# Altium PCB board.PcbDoc (part 2 of 2)
Units mil, origin at the board's own origin, x right, y up, seen from the top; angles counter-clockwise.
Board outline 2780 x 1500 mil, 6 copper layers (Top Layer, Mid Layer 1, Mid Layer 2, Mid Layer 3, Mid Layer 4, Bottom Layer), stack 60.566 mil thick; 88 components, 67 nets, 504 pads, 102 vias.
Unrouted connection lines stored in the file: 21.
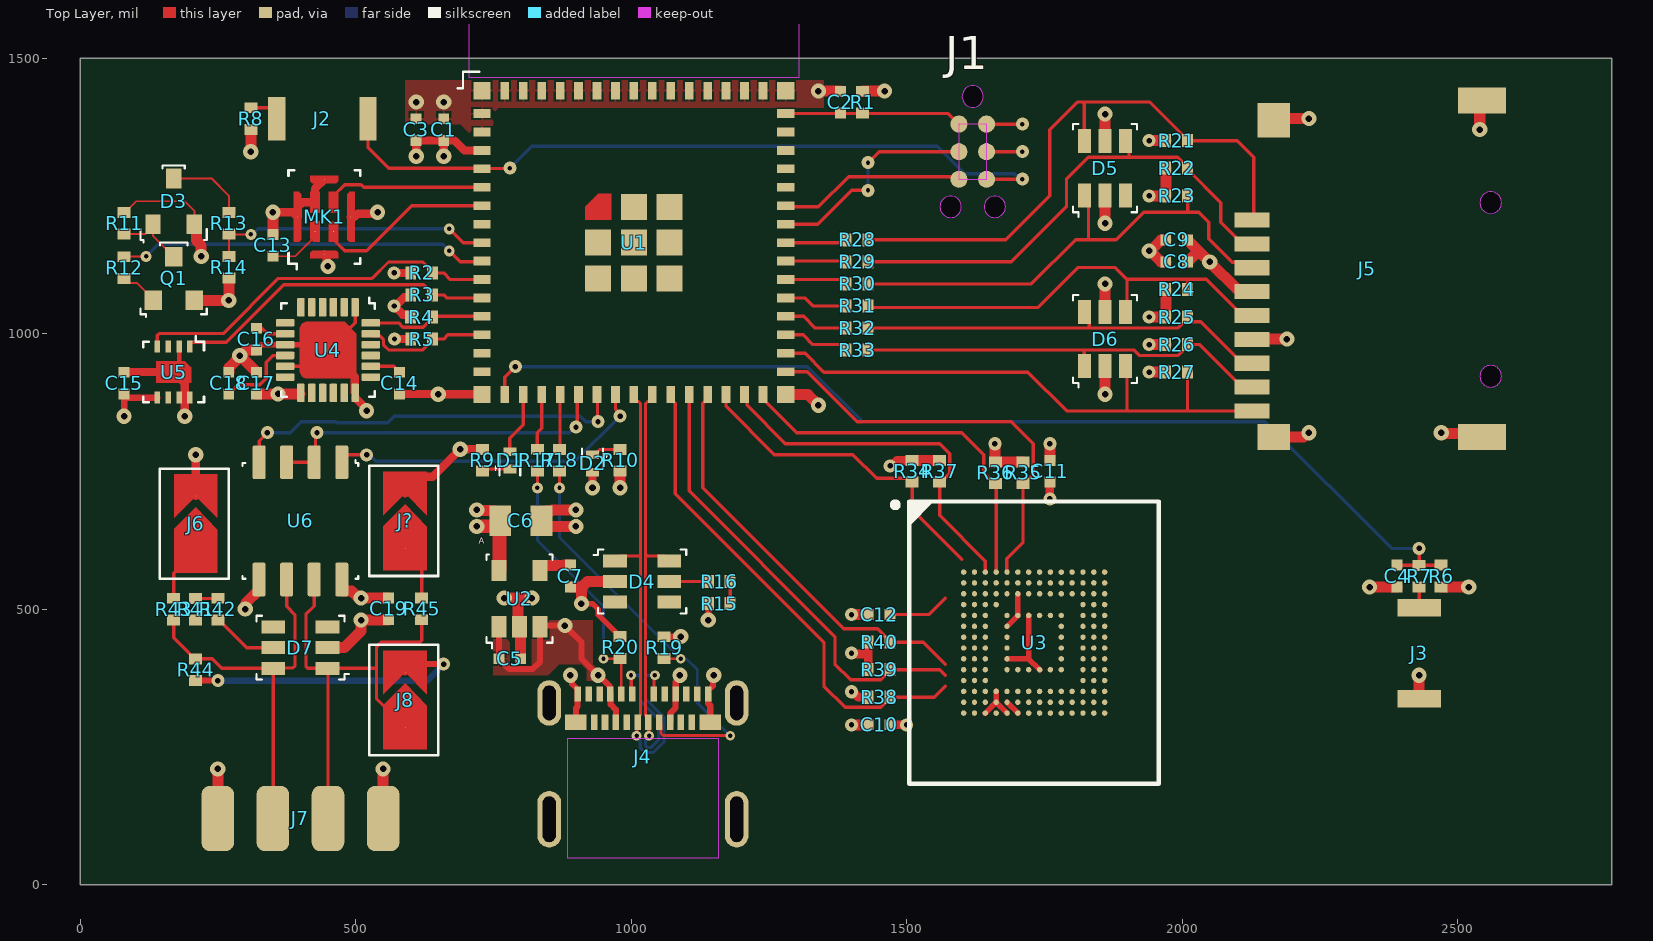
[diagram p0: Top Layer view]

## Part data (continued)
R17 R18: "RC Series 0402 0.063 W 0 Ohm Jumper Surface Mount Thick Film Chip Resistor RC0402FR-070RL", Case Code (Imperial)=0402, Case Code (Metric)=1005, JLCPCB=C106231, Manufacturer=Yageo, Manufacturer Part Number=RC0402FR-070RL, Max Operating Temperature=155°C, Max Power Dissipation=63mW, Min Operating Temperature=-55°C, Power Rating=62.5mW, Resistance=0R, Resistor Type="Thick Film", Temperature Coefficient=200ppm/°C, Tolerance=1%, Voltage Rating=50V, Case/Package=0402, Category="Chip SMD Resistors", ComponentLink1Description=https://datasheet.ciiva.com/8896/pyu-rc0402-51-rohs-l-6-8896149.pdf?src-supplier=Avnet, ComponentLink1URL=https://datasheet.ciiva.com/8896/pyu-rc0402-51-rohs-l-6-8896149.pdf?src-supplier=Avnet, ComponentLink2Description=https://datasheet.ciiva.com/16790/pyu-rc0402-51-rohs-l-6-r-16790444.pdf?src-supplier=Future+Electronics, ComponentLink2URL=https://datasheet.ciiva.com/16790/pyu-rc0402-51-rohs-l-6-r-16790444.pdf?src-supplier=Future+Electronics, Contact Plating=Tin,Matte, Features="Moisture Resistant", Height=0.35mm, Lead Free="Lead Free", Length=1mm, Mount="Surface Mount", Number of Terminations=2, Packaging="Tape and Reel", Pricing 1="10000=0,00120, 30000=0,00110, 50000=0,00100 (USD)", Pricing 2="1=0,10000, 10=0,01200, 25=0,00840, 50=0,00640, 100=0,00480, 250=0,00364, 500=0,00290, 1000=0,00214, 5000=0,00154 (USD)", Pricing 3="1=0,10000, 10=0,01400, 50=0,01400, 100=0,00600, 1000=0,00300, 5000=0,00200, 10000=0,00100 (USD)", Radiation Hardening=No, RoHS=Yes, RoHS Compliant=Yes, Series=RC, Size Code=0402, Stock 1=810000, Stock 2=9382775, Stock 3=8133261, Supplier 1="Arrow Electronics", Supplier 2=Digi-Key, Supplier 3=Mouser, Supplier Part Number 1=RC0402FR-070RL, Supplier Part Number 2=311-0.0LRCT-ND, Supplier Part Number 3=603-RC0402FR-070RL, Termination=SMD/SMT, Width=0.5mm
R19 R20: "Res Thick Film 1.0 x 0.5 mm 5.1K Ohm 1% 0.063W(1/16W) 100ppm/ C Molded SMD Paper T/R RC0402FR-075K1L", Case Code (Imperial)=0402, Case Code (Metric)=1005, JLCPCB=C105872, Manufacturer=Yageo, Manufacturer Part Number=RC0402FR-075K1L, Max Operating Temperature=155°C, Max Power Dissipation=63mW, Min Operating Temperature=-55°C, Package Quantity=1, Resistance=5.1kR, Resistance Tolerance=1%, Resistor Type="Thick Film", Temperature Coefficient=100ppm/°C, Voltage Rating=50V, Case/Package=0402, Category="Chip SMD Resistors", ComponentLink1Description=https://datasheet.ciiva.com/7983/1018594-7983519.pdf?src-supplier=Element14, ComponentLink1URL=https://datasheet.ciiva.com/7983/1018594-7983519.pdf?src-supplier=Element14, ComponentLink2Description=https://datasheet.ciiva.com/46394/1018594-46394936.pdf?src-supplier=Element14, ComponentLink2URL=https://datasheet.ciiva.com/46394/1018594-46394936.pdf?src-supplier=Element14, ComponentLink3Description=https://datasheet.ciiva.com/2453/pyu-r-int-thick-7-2453401.pdf?src-supplier=Digi-Key, ComponentLink3URL=https://datasheet.ciiva.com/2453/pyu-r-int-thick-7-2453401.pdf?src-supplier=Digi-Key, ComponentLink4Description=https://datasheet.ciiva.com/2453/pyu-r-int-thick-7-2453402.pdf?src-supplier=Digi-Key, ComponentLink4URL=https://datasheet.ciiva.com/2453/pyu-r-int-thick-7-2453402.pdf?src-supplier=Digi-Key, ComponentLink5Description=https://datasheet.ciiva.com/2453/pyu-r-int-thick-7-2453400.pdf?src-supplier=Digi-Key, ComponentLink5URL=https://datasheet.ciiva.com/2453/pyu-r-int-thick-7-2453400.pdf?src-supplier=Digi-Key, ComponentLink6Description=https://datasheet.ciiva.com/12558/pyu-rc0402-51-rohs-l-6-r-8721-12558460.pdf?src-supplier=Mouser, ComponentLink6URL=https://datasheet.ciiva.com/12558/pyu-rc0402-51-rohs-l-6-r-8721-12558460.pdf?src-supplier=Mouser, ComponentLink7Description=https://datasheet.ciiva.com/16744/pyu-rc0402-51-rohs-l-6-r-16744283.pdf?src-supplier=Future+Electronics, ComponentLink7URL=https://datasheet.ciiva.com/16744/pyu-rc0402-51-rohs-l-6-r-16744283.pdf?src-supplier=Future+Electronics, ComponentLink8Description=https://datasheet.ciiva.com/15189/getdatasheetpartid-323636-15189493.pdf?src-supplier=Verical, ComponentLink8URL=https://datasheet.ciiva.com/15189/getdatasheetpartid-323636-15189493.pdf?src-supplier=Verical, Construction=Rectangular, Depth=0.5mm, Features="Moisture Resistant", Height=0.016inch, Lead Free="Lead Free", Length=1mm, Military Standard=Not, Number of Terminations=2, Packaging="Tape and Reel", Power Rating=63mW, Pricing 1="10000=0,00180, 30000=0,00160, 50000=0,00140, 100000=0,00140 (USD)", Pricing 2="10000=0,00100 (GBP)", Pricing 3="1=0,10000, 10=0,01200, 50=0,01200, 100=0,00500, 1000=0,00300, 2500=0,00200, 10000=0,00100 (USD)", REACH SVHC=Unknown, RoHS=Yes, RoHS Compliant=Yes, Series=RC, Stock 1=170000, Stock 2=17100, Stock 3=769920, Supplier 1="Arrow Electronics", Supplier 2=RSComponents, Supplier 3=Mouser, Supplier Part Number 1=RC0402FR-075K1L, Supplier Part Number 2=1987834, Supplier Part Number 3=603-RC0402FR-075K1L, Technology="THICK FILM", Termination=SMD/SMT, Tolerance=1%, Voltage Rating (DC)=50V, Width=0.02inch, Working Voltage=50V
R28 R29 R30 R31 R32 R33: "Res Thick Film 0402 15 Ohm 5% 1/10W ±200ppm/°C Molded SMD Punched Carrier T/R ERJ-2GEJ150X", Case Code (Imperial)=0402, Case Code (Metric)=1005, JLCPCB=C412910, Manufacturer=Panasonic, Manufacturer Part Number=ERJ-2GEJ150X, Max Operating Temperature=155°C, Max Power Dissipation=100mW, Min Operating Temperature=-55°C, Package Quantity=1, Resistance=15R, Resistance Tolerance=5%, Resistor Type="Thick Film", Temperature Coefficient=200ppm/°C, Voltage Rating=50V, Case/Package=0402, Category="Chip SMD Resistors", ComponentLink1Description=https://datasheet.ciiva.com/11821/0900766b80f806dd-11821198.pdf?src-supplier=RSComponents, ComponentLink1URL=https://datasheet.ciiva.com/11821/0900766b80f806dd-11821198.pdf?src-supplier=RSComponents, ComponentLink2Description=https://datasheet.ciiva.com/8081/aoa0000ce1-8081306.pdf?src-supplier=Element14, ComponentLink2URL=https://datasheet.ciiva.com/8081/aoa0000ce1-8081306.pdf?src-supplier=Element14, ComponentLink3Description=https://datasheet.ciiva.com/43470/1678796-43470027.pdf?src-supplier=Farnell, ComponentLink3URL=https://datasheet.ciiva.com/43470/1678796-43470027.pdf?src-supplier=Farnell, ComponentLink4Description=https://datasheet.ciiva.com/46380/1678796-46380221.pdf?src-supplier=Element14, ComponentLink4URL=https://datasheet.ciiva.com/46380/1678796-46380221.pdf?src-supplier=Element14, ComponentLink5Description=https://datasheet.ciiva.com/16774/70260739-16774952.pdf?src-supplier=Allied+Electronics, ComponentLink5URL=https://datasheet.ciiva.com/16774/70260739-16774952.pdf?src-supplier=Allied+Electronics, ComponentLink6Description=https://datasheet.ciiva.com/9119/aoa0000ce1-9119005.pdf?src-supplier=Avnet, ComponentLink6URL=https://datasheet.ciiva.com/9119/aoa0000ce1-9119005.pdf?src-supplier=Avnet, Construction=Rectangular, Contact Plating=Tin, Depth=0.5mm, Features="Automotive AEC-Q200", Height=0.35mm, Lead Free="Lead Free", Length=1mm, Military Standard=Not, Mount="Surface Mount", Number of Terminations=2, Packaging="Tape and Reel", Power Rating=100mW, Pricing 1="1=0,04910, 10=0,01270, 25=0,00660, 100=0,00350, 250=0,00340, 3000=0,00330 (USD)", Pricing 2="1=0,10000, 10=0,02900, 50=0,02900, 100=0,01200, 1000=0,00600, 2500=0,00500, 5000=0,00400, 10000=0,00400 (USD)", Radiation Hardening=No, REACH SVHC="No SVHC", RoHS=Yes, RoHS Compliant=Yes, Series=ERJ, Stock 1=8902, Stock 2=72720, Supplier 1="Arrow Electronics", Supplier 2=Mouser, Supplier 3=RSComponents, Supplier Part Number 1=ERJ-2GEJ150X, Supplier Part Number 2=667-ERJ-2GEJ150X, Supplier Part Number 3=7324921, Technology="THICK FILM", Termination=SMD/SMT, Tolerance=5%, Voltage Rating (DC)=50V, Width=0.5mm
R44: "Res General Purpose Thick Film 0402 100 Ohm 5% 1/16W ±100ppm/°C Molded SMD Paper T/R RC0402JR-07100RL", Case Code (Imperial)=0402, Case Code (Metric)=1005, JLCPCB=C106233, Manufacturer=Yageo, Manufacturer Part Number=RC0402JR-07100RL, Max Operating Temperature=155°C, Max Power Dissipation=63mW, Min Operating Temperature=-55°C, Package Quantity=1, Resistance=100R, Resistance Tolerance=5%, Resistor Type="Thick Film", Temperature Coefficient=100ppm/°C, Voltage Rating=50V, Case/Package=0402, Category="Chip SMD Resistors", ComponentLink1Description=https://datasheet.ciiva.com/46394/1018594-46394943.pdf?src-supplier=Element14, ComponentLink1URL=https://datasheet.ciiva.com/46394/1018594-46394943.pdf?src-supplier=Element14, ComponentLink2Description=https://datasheet.ciiva.com/2452/pyu-r-int-thick-7-2452618.pdf?src-supplier=Digi-Key, ComponentLink2URL=https://datasheet.ciiva.com/2452/pyu-r-int-thick-7-2452618.pdf?src-supplier=Digi-Key, ComponentLink3Description=https://datasheet.ciiva.com/2452/pyu-r-int-thick-7-2452619.pdf?src-supplier=Digi-Key, ComponentLink3URL=https://datasheet.ciiva.com/2452/pyu-r-int-thick-7-2452619.pdf?src-supplier=Digi-Key, ComponentLink4Description=https://datasheet.ciiva.com/2452/pyu-r-int-thick-7-2452617.pdf?src-supplier=Digi-Key, ComponentLink4URL=https://datasheet.ciiva.com/2452/pyu-r-int-thick-7-2452617.pdf?src-supplier=Digi-Key, ComponentLink5Description=https://datasheet.ciiva.com/12577/pyu-rc0402-51-rohs-l-6-r-12577725.pdf?src-supplier=Mouser, ComponentLink5URL=https://datasheet.ciiva.com/12577/pyu-rc0402-51-rohs-l-6-r-12577725.pdf?src-supplier=Mouser, ComponentLink6Description=https://datasheet.ciiva.com/7850/1018594-7850135.pdf?src-supplier=Element14, ComponentLink6URL=https://datasheet.ciiva.com/7850/1018594-7850135.pdf?src-supplier=Element14, ComponentLink7Description=https://datasheet.ciiva.com/7850/1018594-7850134.pdf?src-supplier=Element14, ComponentLink7URL=https://datasheet.ciiva.com/7850/1018594-7850134.pdf?src-supplier=Element14, ComponentLink8Description=https://datasheet.ciiva.com/16740/pyu-rc0402-51-rohs-l-6-r-16740924.pdf?src-supplier=Future+Electronics, ComponentLink8URL=https://datasheet.ciiva.com/16740/pyu-rc0402-51-rohs-l-6-r-16740924.pdf?src-supplier=Future+Electronics, Construction=Rectangular, Depth=0.5mm, Features="Moisture Resistant", Height=0.016inch, Lead Free="Lead Free", Length=1mm, Military Standard=Not, Number of Terminations=2, Packaging="Tape and Reel", Power Rating=63mW, Pricing 1="10000=0,00120, 30000=0,00110, 100000=0,00100 (USD)", Pricing 2="1000=0,00400, 2500=0,00400, 5000=0,00400, 10000=0,00300 (GBP)", Pricing 3="1=0,10000, 10=0,01200, 100=0,00500, 1000=0,00225, 2500=0,00195, 5000=0,00161 (USD)", Pricing 4="1=0,10000, 10=0,01000, 50=0,01000, 100=0,00500, 1000=0,00200, 10000=0,00100 (USD)", REACH SVHC="No SVHC", RoHS=Yes, RoHS Compliant=Yes, Series=RC, Size Code=0402, Stock 1=7500000, Stock 2=25100, Stock 3=12189062, Stock 4=1266422, Supplier 1="Arrow Electronics", Supplier 2=RSComponents, Supplier 3=Digi-Key, Supplier 4=Mouser, Supplier Part Number 1=RC0402JR-07100RL, Supplier Part Number 2=1987887P, Supplier Part Number 3=311-100JRCT-ND, Supplier Part Number 4=603-RC0402JR-07100RL, Termination=SMD/SMT, Tolerance=5%, Weight=2.3E-05oz, Width=0.02inch
U1: "SMD Module, ESP32-S3FN8, 8 mb Sp ESP32-S3-MINI-1-N8", JLCPCB=C2913206, Manufacturer="Espressif Systems", Manufacturer Part Number=ESP32-S3-MINI-1-N8, Supplier Part Number 1=1965-ESP32-S3-MINI-1-N8-ND, Category=Uncategorized, ComponentLink1Description="Real datasheet", ComponentLink1URL=https://www.espressif.com/sites/default/files/documentation/esp32-s3-mini-1_mini-1u_datasheet_en.pdf, Pricing 1="1=3,41000 (USD)", RoHS=No, Stock 1=6782, Supplier 1=Digi-Key
U2: library part "U SPX3819M5 3.3V", "SPX3819 Series 3.3 V 500 mA Fixed Output SMT LDO Regulator - SOT-23-5", JLCPCB=C9055, Manufacturer=MaxLinear, Supplier Part Number 1=701-SPX3819M5-L-33TR, Category="Voltage Regulators - Linear", Manufacturer Part Number=SPX3819M5-L-3-3/TR, Pricing 1="1=0,56000, 10=0,45600, 50=0,45600, 100=0,32800, 1000=0,21500, 10000=0,19500 (USD)", Pricing 2="10=0,59100, 50=0,46800, 100=0,45400, 250=0,39800, 500=0,33700, 10=0,42700, 50=0,33800, 100=0,32800, 250=0,28700, 500=0,24300 (USD)", RoHS=Yes, RoHS Compliant=Yes, Stock 1=726, Stock 2=290, Supplier 1=Mouser, Supplier 2=RSComponents, Supplier Part Number 2=8472888
U3: "KLMAG1JETD-B041 16Gbit -25℃~+85℃ 2.7V~3.6V eMMC 5.1 FBGA-153 eMMC ROHS", JLCPCB=C499919, Manufacturer=Samsung, Manufacturer Part Number=KLMAG1JETD-B041, Supplier Part Number 1=KLMAG1JETD-B0410, RoHS=No, Supplier 1="Arrow Electronics"
U4: "IMU ACCEL/GYRO 3-AXIS I2C 24QFN", Case/Package=QFN, JLCPCB=C24112, Manufacturer="TDK InvenSense", Manufacturer Part Number=MPU-6050, Max Operating Temperature=85°C, Min Operating Temperature=-40°C, Category="Inertial Measurement Units (IMUs)", ComponentLink1Description=https://datasheet.ciiva.com/1513/1788002-1513632.pdf?src-supplier=Element14, ComponentLink1URL=https://datasheet.ciiva.com/1513/1788002-1513632.pdf?src-supplier=Element14, ComponentLink2Description=https://datasheet.ciiva.com/22731/1788002-22731434.pdf?src-supplier=Element14, ComponentLink2URL=https://datasheet.ciiva.com/22731/1788002-22731434.pdf?src-supplier=Element14, Mount="Surface Mount", Output Type=I2C, Packaging="Tape and Reel", Pricing 1="5000=3,94760, 10000=3,89200, 20000=3,78080, 30000=3,69740, 40000=3,55840, 50000=3,47500, 500000=3,39160 (USD)", RoHS=Yes, RoHS Compliant=Yes, Sensor Type="Accelerometer,Gyroscope,3 Axis", Series=-, Supplier 1=Avnet, Supplier Part Number 1=MPU-6050
U5: "Humidity/Temperature Sensor Digital Serial (I2C) 8-Pin DFN EP T/R SHT30-DIS-B2.5KS", JLCPCB=C77361, Manufacturer=Sensirion, Manufacturer Part Number=SHT30-DIS-B2.5KS, Category="Temperature and Humidity Sensors", ComponentLink1Description=https://media.digikey.com/pdf/Data%20Sheets/Sensirion%20PDFs/HT_DS_SHT3x_DIS.pdf?src-supplier=Digi-Key, ComponentLink1URL=https://media.digikey.com/pdf/Data%20Sheets/Sensirion%20PDFs/HT_DS_SHT3x_DIS.pdf?src-supplier=Digi-Key, Pricing 1="2500=1,79820 (USD)", Pricing 2="1=3,98000, 5=3,51000, 10=3,10000, 25=2,51560, 50=2,22300, 100=2,16450, 500=1,81350, 1000=1,69650 (USD)", Pricing 3="1=3,86000, 10=2,45000, 50=2,45000, 100=2,25000, 500=1,90000, 1000=1,78000, 2500=1,71000, 5000=1,57000, 10000=1,55000, 25000=1,52000 (USD)", RoHS=Yes, RoHS Compliant=Yes, Stock 1=90000, Stock 2=10530, Stock 3=49374, Supplier 1="Arrow Electronics", Supplier 2=Digi-Key, Supplier 3=Mouser, Supplier Part Number 1=SHT30-DIS-B2.5KS, Supplier Part Number 2=1649-1009-1-ND, Supplier Part Number 3=403-SHT30-DIS-B
U6: "Single Transmitter/Receiver RS-422/RS-485 8-Pin SOIC N", Case/Package=SOIC, JLCPCB=C9943, Manufacturer=Maxim, Manufacturer Part Number=MAX3485EESA+, Max Operating Temperature=85°C, Max Power Dissipation=471mW, Max Supply Voltage=3.6V, Min Operating Temperature=-40°C, Min Supply Voltage=3V, Operating Supply Current=1.1mA, Operating Supply Voltage=3.3V, Output Current=20uA, Package Quantity=100, Supplier Part Number 1=1901234P, Category="RS-232 / RS-422 / RS-485 Interface ICs", ComponentLink1Description=https://datasheet.ciiva.com/1714/max3483e-max3491e-1714390.pdf?src-supplier=Digi-Key, ComponentLink1URL=https://datasheet.ciiva.com/1714/max3483e-max3491e-1714390.pdf?src-supplier=Digi-Key, ComponentLink2Description=https://datasheet.ciiva.com/3028/max3483e-max3491e-3028632.pdf?src-supplier=Avnet, ComponentLink2URL=https://datasheet.ciiva.com/3028/max3483e-max3491e-3028632.pdf?src-supplier=Avnet, Contact Plating=Tin,Matte, Data Rate=15Mbps, Height=1.5mm, Interface=RS-422,RS-485, Length=5mm, Logic Function=Transceiver, Mount="Surface Mount", Number of Drivers=1, Number of Pins=8, Number of Receivers=1, Number of Transceivers=1, Number of Transmitters=1, Output Voltage=3V, Packaging=Rail/Tube, Pricing 1="25=6,27000, 50=5,80800, 125=5,54400 (GBP)", Pricing 2="1=7,18000, 10=6,49000, 50=6,19000, 100=5,37000, 1000=5,12000, 10000=5,12000 (USD)", Propagation Delay=62ns, Radiation Hardening=No, REACH SVHC="No SVHC", RoHS=Yes, RoHS Compliant=Yes, Series=-, Simplex/Duplex="Half Duplex", Stock 1=4140, Supplier 1=RSComponents, Supplier 2=Mouser, Supplier Part Number 2=700-MAX3485EESA, Weight=0.019048oz, Width=4mm

## Via types
v1: diameter 27.56, hole 11.81, Top Layer to Bottom Layer, 56 vias
v2: diameter 23.62, hole 9.84, Top Layer to Bottom Layer, 27 vias
v3: diameter 17.72, hole 7.87, Top Layer to Bottom Layer, 7 vias
v4: diameter 23.62, hole 7.87, Top Layer to Bottom Layer, 6 vias
v5: diameter 19.68, hole 7.87, Top Layer to Bottom Layer, 6 vias

## Nets (pads, with @x,y where several pads share a name; then routed paths per layer and width w, separated by ;. In a path a pad name is that pad's centre, name@x,y a point inside that pad or via, vN(x,y) a via of type N, cw(c..) or ccw(c..) an arc to the next point about the centre after c; other vN are vias at no path point)
+3.3: C1.1 C3.1 C6.A C8.2 C9.2 C10.2 C11.2 C15.2 C16.1 C17.2 D2.2 D5.5 D6.5 J1.2 J5.4 J6.2 J7.4 R1.2 R2.2 R3.2 R4.2 R5.2 R6.2 R21.2 R22.2 R23.2 R24.2 R25.2 R26.2 R27.2 R34.2 R35.2 R36.2 R37.2 R38.1 R39.2 R40.1 R41.2 U1.3 U2.5 U3.C6 U3.E6 U3.F5 U3.J10 U3.K9 U3.M4 U3.N4 U3.P3 U3.P5 U4.8 U4.13 U5.5 | length 2129.5
  Top Layer w6: C16.1 320.32,1010 330,1010 340.47,999.53 U4.8 ; J1.2 v4(1710,1380)
  Top Layer w10: U3.P3 U3.N4 ; U3.M4 U3.N4 ; U3.P5 U3.N4 ; U3.F5 U3.E6 U3.C6
  Top Layer w11.81: v1(80,850) C15.2@80,883.74 ; C15.2 C15.2@80,883.74 ; U5.5 C15.2@80,883.74
  Top Layer w15: J6.2 v1(210,780) ; v2(570,1050) 585.69,1034.31 597.66,1034.31 600,1031.97 R4.2 ; v2(570,1110) R2.2 ; v2@570.68,990.03 R5.2 ; v2@572.33,1050 588.02,1065.69 597.97,1065.69 600.32,1068.03 R3.2 ; v1(610,1321.78) C3.1 C1.1 ; v1(660,1321.78) C1.1 ; U1.3 697.72,1332.28 679.69,1350.31 C1.1 ; v1(930,720) D2.2
  Top Layer w15.75: v2(1400,350) 1402.13,350 1412.13,340 R38.1 ; v2(1400,420) 1401.51,418.49 1426.82,418.49 1430.31,415 ; R39.2 1430.31,415 ; R40.1 1430.31,415 ; C10.2 v2(1500,290) ; v2(1470,760) 1472.13,760 1481.82,769.69 R34.2 ; v2(1760,700) C11.2
  Top Layer w20: J7.4 v1(250,210) ; C17.2 U4.13@398.86,890.31 ; v1(720,680) 721.45,678.55 744.04,678.55 745.04,677.56 752.91,677.56 762.6,667.87 C6.A ; R1.2 1420.16,1439.84 1422.13,1439.84 1422.28,1440 v1(1460,1440) ; R34.2 R37.2 ; v2(1660,800) 1660.63,799.37 1660.63,767.32 1660.79,767.17 R36.2 R35.2 ; D6.5 v1(1860,1090) ; D5.5 v1(1860,1398.22) ; v2(1940,930) R27.2 ; v2(1940,980) R26.2 ; v2(1940,1030) R25.2 R24.2 ; v2(1940,1250) R23.2 R22.2 ; v2(1940,1350) R21.2 ; C8.2 2029.61,1149.92 ; C9.2 2029.61,1150.08 2029.61,1149.92 ; v1@2049.76,1129.76 2029.61,1149.92 ; v1(2050,1130) 2100.16,1079.84 2123.15,1079.84 J5.4 ; R6.2 2470.16,540.16 2476.06,540.16 2476.22,540 v1(2520,540)
  Top Layer w25: v1(720,650) 720.49,650.49 755.41,650.49 C6.A@761.08,656.16 ; U2.5 761.08,571.08 C6.A@761.08,656.16 ; C6.A 762.6,657.67 C6.A@761.08,656.16
  other v1: 359.43,890.31
  other v2: 570.65,990.05
ACTIVATE_ADC: R12.1 U1.9 | length 672.5
  Top Layer w3.5: R12.1 80.63,1140 v5(120,1140)
  Top Layer w6: v5(670,1150) 690,1130 727.95,1130 U1.9
  Bottom Layer w6: v5(120,1140) 141.78,1161.78 658.22,1161.78 v5(670,1150)
ADC_MEASURE: R13.1 R14.2 U1.8 | length 514.4
  Top Layer w3.5: R14.2 R13.1 270.32,1180 v5(310,1180)
  Top Layer w6: v5(670,1190) 695.04,1164.96 U1.8
  Bottom Layer w6: v5(310,1180) 313.7,1180 323.7,1190 v5(670,1190)
CC1: R17.2 U1.18 | length 102.6
  Top Layer w6: R17.2 830,820 837.72,827.72 U1.18
CC2: R18.2 U1.19 | length 100.2
  Top Layer w6: R18.2 871.18,790.87 U1.19
EMMC_CLK: R38.2 U1.25 U3.M5 | length 897.4
  Top Layer w6: U1.25 1071.97,881.5 1080,873.46 1080,709.47 1350,439.47 1350,360 1388.31,321.69 1453.34,321.69 1469.69,338.03 R38.2 1550,340 1570,360
EMMC_CMD: R39.1 U1.26 U3.M6 | length 823.6
  Top Layer w6: U1.26 1105.43,714.57 1370,450 1370,400 1398.31,371.69 1453.34,371.69 1469.69,388.03 R39.1 1560,390 1570,380
EMMC_DAT0: R37.1 U1.29 U3.A3 | length 683.9
  Top Layer w6: U1.29 1210.4,884.79 1210.4,869.6 1280,800 1560.53,800 1578.31,782.22 1578.31,746.66 1561.97,730.31 R37.1 1560,670 1642.83,587.17 U3.A3
EMMC_DAT1: R36.1 U1.30 U3.A4 | length 673.9
  Top Layer w6: U1.30 1239.29,881.5 1300.79,820 1600,820 1640,780 1640,747.09 1659.29,727.8 R36.1 1662.52,726.54 U3.A4
EMMC_DAT2: R35.1 U1.31 U3.A5 | length 757.9
  Top Layer w6: U1.31 1319.29,930.71 1410,840 1690,840 1730,800 1730,744.57 1713.23,727.8 R35.1 1711.26,621.26 1681.47,591.47 1681.47,567.9 U3.A5
EMMC_DAT3: R34.1 U1.28 U3.B2 | length 593.8
  Top Layer w6: U1.28 1172.36,867.64 1260,780 1402.68,780 1445.52,737.16 1503.16,737.16 R34.1 1510,680 1600,590
EMMC_RSTN: R40.2 U1.27 U3.K5 | length 747.1
  Top Layer w6: U1.27 1138.9,881.5 1134.02,876.62 1133.51,876.62 1130,873.11 1130,720 1385.59,464.41 1447.25,464.41 1469.69,441.97 R40.2 1530,440 1570,400
ESP_RXD: J1.5 U1.40 | length 339.8
  Top Layer w6: U1.40 1282.52,1230 1340,1230 1394.78,1284.78 1590.22,1284.78 J1.5
ESP_TXD: J1.3 U1.39 | length 398.2
  Top Layer w6: U1.39 1338.43,1198.43 1400,1260 v4(1430,1260) ; v4(1430,1310) 1450,1330 J1.3
  Bottom Layer w6: v4(1430,1260) v4(1430,1310)
GND: C1.2 C2.1 C3.2 C4.1 C5.1 C6.K C7.1 C8.1 C9.1 C10.1 C11.1 C12.1 C13.1 C14.2 C15.1 C16.2 C17.1 C18.1 C19.2 D4.2 D5.2 D6.2 D7.2 J1.4 J3.1 J4.A1 J4.A12 J4.B1 J4.B12 J5.6 J5.CASE J7.1 J?.2 MK1.2 MK1.5 MK1.6 MK1.7 MK1.8 Q1.2 R8.1 R9.1 R10.1 R14.1 R19.1 R20.1 U1.1 U1.2 U1.42 U1.43 U1.46 U1.62 U2.2 U3.A6 U3.C4 U3.E7 U3.G5 U3.H10 U3.J5 U3.K8 U3.N2 U3.N5 U3.P4 U3.P6 U4.1 U4.9 U4.11 U4.18 U4.25 U5.2 U5.7 U5.8 U5.DP U6.5 | length 3631.8
  Top Layer w6: U4.11 420.47,940.47 U4.25 ; 440.16,979.84 U4.25 ; U4.1 499.21,1019.21 U4.25 ; J1.4 v4(1710,1330) ; J5.CASE@2540,1418.27 J5.CASE@2544.25,1422.52
  Top Layer w7.87: U5.DP 180,940 180,976.1 U5.2
  Top Layer w9.84: C16.2 329.53,979.84 U4.9 440.16,979.84
  Top Layer w10: v1(910,510) 930,510 940.63,499.37 940.63,489.37 973.19,456.81 973.19,454.84 978.03,450 R20.1 ; U3.N5 U3.P6 ; U3.J5 1721.57,409.69 ; U3.E7 1721.57,409.69 ; U3.K8 1721.57,409.69
  Top Layer w11: v1(890,380) 893.17,376.83 893.17,364 903.06,354.11 903.06,323.06 900,320 900,295.12 J4.B12 ; R19.1 1060.16,449.84 1089.84,449.84 v1(1090,450) ; J4.B1 1143.62,324.93 1140.09,328.46 1140.09,345.42 J4.A12 1139.69,353.7 1140.09,354.11 1142.18,354.11 1148.63,360.55 1148.63,378.63 v1(1150,380)
  Top Layer w15: C15.1 80.32,930 U5.DP 190,910 v1(190,850) ; v1(350,1220) 386.61,1220 MK1.6 395.04,1229.36 403.83,1238.15 MK1.2 426.54,1262.76 MK1.7 ; MK1.5 447.6,1139.33 447.6,1124.18 v1(450,1121.78) ; U4.25 498.6,921.4 498.6,892.85 U4.18 ; MK1.8 498.18,1211.57 504.2,1217.6 537.6,1217.6 v1(540,1220) ; U4.18@499.82,883.01 520,862.83 v1(520,860) ; C14.2 580.16,890.16 649.84,890.16 v1(650,890) 650.32,889.69 729.13,889.69 U1.62@729.45,889.37 ; J?.2 620,740 640,740 v1(690,790) 690.16,789.84 729.84,789.84 R9.1
  Top Layer w20: Q1.2 207.72,1060.31 269.69,1060.31 v1(270,1060) R14.1 ; C18.1 270,937.95 290,957.95 v1(290,960) ; v1(300,500) 301.45,501.45 301.45,511.45 325,535 U6.5 ; v1(310,1330) R8.1 ; C17.1 320,930 v1(290,960) ; C16.2 310.32,970.31 310,970 302.05,970 292.05,960 v1(290,960) ; C13.1 v1(350,1220) ; D7.2 480,430 510,460 v1(510,480) 559.37,480 C19.2 ; J7.1 v1(550,210) ; v1(770,520) 795,520 ; C5.1 799.68,465.75 U2.2 795,470.43 795,520 ; v1(820,520) 795,520 ; C7.1 909.75,540.32 910,540.06 910,539.06 ; v1(900,650) 847.09,650 837.4,659.69 C6.K 837.4,667.87 847.09,677.56 854.96,677.56 857.4,680 v1(900,680) ; v1(910,510) 910,539.06 ; D4.2 920.94,550 910,539.06 ; v1(980,720) R10.1 ; U1.62@1280.63,889.37 1320.63,889.37 v1(1340,870) ; v1(1340,1440) 1379.69,1440 C2.1 ; v2(1400,290) C10.1 ; v2(1400,490) C12.1 ; C11.1 v2(1760,800) ; v1(1860,890) D6.2 ; v1(1860,1200) D5.2 ; v1(1940,1150) v1@1942.05,1150 ; C8.1 1962.05,1130 v1@1942.05,1150 ; C9.1 1962.05,1170 v1@1942.05,1150 ; J5.6 2127.2,989.72 2189.72,989.72 v1(2190,990) ; J5.CASE@2166.3,812.28 2220.24,812.28 2227.95,820 v1(2230,820) ; J5.CASE@2166.3,1387.09 2169.21,1390 v1(2230,1390) ; v1(2340,540) 2389.69,540 C4.1 ; J3.1 v1(2430,380) ; v1(2470,820) 2471.45,818.55 2537.98,818.55 J5.CASE@2544.25,812.28 ; v1(2540,1370) J5.CASE@2540,1418.27
  other v1: 610,1420 660,1420
I2SCLK: MK1.3 U1.5 | length 291.5
  Top Layer w6: MK1.3 460,1250 480,1270 510,1270 514.65,1265.35 U1.5
I2SDAT: MK1.4 U1.6 | length 326.7
  Top Layer w6: MK1.4 460,1170 480,1150 520,1150 601.89,1231.89 U1.6
NetC4_2: C4.2 R6.1 R7.2 U1.16 | length 1945.9
  Top Layer w6: U1.16 770.79,920.79 v2(790,940) ; C4.2 R7.2@2430,579.68 ; v2(2430,610) R7.2@2430,579.68 ; R6.1 R7.2@2430,579.68
  Top Layer w20: R7.2 R7.2@2430,579.68
  Bottom Layer w6: v2(790,940) 1320,940 1420,840 2150,840 2380,610 v2(2430,610)
NetC7_2: C7.2 U2.4 | length 62.7
  Top Layer w20: U2.4 834.8,575.91 838.39,579.49 878.39,579.49 878.58,579.68 C7.2
NetC12_2: C12.2 U3.C2 | length 112.7
  Top Layer w6: C12.2 1540,490 1570,520
NetC13_2: C13.2 MK1.1 | length 100
  Top Layer w3.5: C13.2 390.32,1140.31 426.54,1176.54 MK1.1
NetC14_1: C14.1 U4.20 | length 56.8
  Top Layer w6: U4.20 569.21,940.47 C14.1
NetC18_2: C18.2 U4.10 | length 148.3
  Top Layer w6: C18.2 286.84,907.15 326.35,907.15 338.17,918.98 338.17,948.17 350,960 372.09,960 U4.10
NetD1_1: D1.1 R9.2 | length 51.6
  Top Layer w6: R9.2 733.94,754.25 D1.1
NetD1_2: D1.2 U1.17 | length 113.7
  Top Layer w6: D1.2 780,810 804.25,834.25 U1.17
NetD2_1: D2.1 R10.2 | length 54
  Top Layer w6: D2.1 933.94,780 943.62,789.69 R10.2
NetD3_1: D3.1 Q1.3 R11.1 | length 134.5
  Top Layer w3.5: R11.1 118.19,1180.31 D3.1@132.6,1194.72 ; D3.1 D3.1@132.6,1194.72 ; Q1.3 170,1141.34 156,1155.34 154.03,1155.34 132.6,1176.77 D3.1@132.6,1194.72
NetD3_3: D3.3 R13.2 | length 143.3
  Top Layer w3.5: D3.3 238.66,1281.34 270,1250 R13.2
NetD4_5: D4.5 R16.1 | length 71.1
  Top Layer w6: D4.5 R16.1
NetD5_1: D5.1 J5.3 R23.1 R30.1 | length 920.9
  Top Layer w6: R30.1 1726.49,1090 1806.49,1170 1830,1170 ; D5.1 1830,1243.39 1830,1170 ; R23.1@2009.69,1248.03 2010,1247.72 2010,1221.43 ; J5.3 2117.08,1129.22 2090.78,1129.22 2047.98,1172.02 2047.98,1202.02 2030,1220 2010,1220 1930,1220 1880,1170 1830,1170
NetD5_4: D5.4 J5.2 R22.1 R29.1 | length 925.4
  Top Layer w6: R29.1 1690,1130 1790,1230 1790,1280 1830,1320 1903.51,1320 ; D5.4 1903.51,1343.1 1903.51,1320 ; J5.2 2109.21,1162.68 2070,1201.89 2070,1237.72 2009.69,1298.03 2009.69,1301.97 1991.65,1320 1903.51,1320
NetD5_6: D5.6 J5.1 R21.1 R28.1 | length 1101.9
  Top Layer w6: R28.1 1680,1170 1760,1250 1760,1370 1810,1420 1820,1420 ; D5.6 1822.6,1417.4 1820,1420 ; R21.1 2100,1350 2130,1320 2130,1209.06 J5.1 ; R21.1@2009.69,1351.97 1941.65,1420 1822.6,1420 1820,1420
NetD6_1: D6.1 J5.8 R26.1 R33.1 | length 772
  Top Layer w6: R33.1 1822.6,970 ; D6.1 1822.6,970 ; J5.8 2109.21,902.83 2032.05,980 R26.1 2009.69,978.03 1991.65,960 1923.05,960 1913.05,970 1822.6,970
NetD6_4: D6.4 J5.5 R24.1 R31.1 | length 843.1
  Top Layer w6: R31.1 1432.39,1047.3 1738.54,1047.3 1811.24,1120 1878.09,1120 1899.78,1098.31 ; D6.4 1899.78,1041.59 1899.78,1098.31 ; R24.1 2010,1080.31 2010,1098.31 ; J5.5 2109.21,1032.76 2043.66,1098.31 2010,1098.31 ; 1899.78,1098.31 2010,1098.31
NetD6_6: D6.6 J5.7 R25.1 R32.1 | length 773.5
  Top Layer w6: R32.1 1831.41,1010 ; D6.6 1831.41,1030.4 1831.41,1010 ; R25.1 R25.1@2009.69,1028.03 ; J5.7 2109.21,946.14 2034.17,1021.19 2016.53,1021.19 R25.1@2009.69,1028.03 ; 1831.41,1010 1991.65,1010 R25.1@2009.69,1028.03
NetD7_1: D7.1 J7.2 J8.1 R45.2 U6.7 | length 859.5
  Top Layer w6: U6.7 425,505.59 410,490.59 410,396.11 413.51,392.6 D7.1 ; J7.2 450,391.81 D7.1 ; J8.1 538.17,336.83 538.17,390 ; R45.2 620,443.51 616.49,440 546.33,440 538.17,431.83 538.17,390 ; D7.1 535.57,392.6 538.17,390
NetD7_5: D7.5 R42.1 | length 121.6
  Top Layer w6: R42.1 251.97,480.32 302.28,430 D7.5
NetD7_6: D7.6 J7.3 R43.1 R44.2 U6.6 | length 713.6
  Top Layer w6: R43.1 170,447.72 208.03,409.68 R44.2 210.32,410 240,410 257.4,392.6 D7.6 ; J7.3 350.79,120.79 D7.6 ; U6.6 375,505 390,490 390,396.64 386.49,393.12 351.31,393.12 D7.6
NetJ2_1: J2.1 R8.2 | length 59.5
  Top Layer w6: R8.2 344.57,1409.69 357.32,1396.94 J2.1
NetJ3_2: J3.2 R7.1 | length 37.3
  Top Layer w6: J3.2 R7.1
NetJ4_A5: J4.A5 R17.1 R20.2 | length 486.3
  Top Layer w5: v5(830,720) R17.1 ; v3(950,410) 979.37,410 R20.2 982.2,408.43 J4.A5
  Bottom Layer w5: v5(830,720) 830,624.73 950,504.73 v3(950,410)
NetJ4_B5: J4.B5 R18.1 R19.2 | length 793.8
  Top Layer w5: v5(870,720) R18.1 ; J4.B5 1054.51,291.24 1054.51,274.25 1058.08,270.68 1179.31,270.68 v3(1180,270) ; R19.2 1060.32,410 v3(1090,410)
  Bottom Layer w5: v5(870,720) 870,630 1091.57,408.43 1101.57,408.43 1120,390 1120,330 v3(1180,270)
NetJ6_1: J6.1 R43.2 | length 101.9
  Top Layer w6: R43.2 170,565 J6.1
NetJ8_2: J8.2 R44.1 | length 538.8
  Top Layer w11: R44.1 210.16,370.16 249.84,370.16 v2(250,370) ; J8.2 605,400 v2(660,400)
  Bottom Layer w11: v2(250,370) 630,370 v2(660,400)
NetJ?_1: J?.1 R45.1 | length 102.4
  Top Layer w6: J?.1 620,580 R45.1
NetQ1_1: Q1.1 R12.2 | length 70.1
  Top Layer w3.5: R12.2 88.09,1091.91 103.29,1091.91 132.6,1062.6 Q1.1
NetR15_1: R15.1 R16.2 | length 40
  Top Layer w6: R15.1 R16.2
NetR41_1: R41.1 R42.2 | length 40.1
  Top Layer w6: R41.1 249.68,519.37 R42.2
PROG_EN: C2.2 J1.1 R1.1 U1.45 | length 324.5
  Top Layer w6: U1.45 C2.2@1380,1399.21 ; C2.2 C2.2@1380,1399.21 ; R1.1 R1.1@1420,1399.21 ; J1.1 1575.79,1399.21 R1.1@1420,1399.21 ; C2.2@1380,1399.21 R1.1@1420,1399.21
PROG_IO0: J1.6 J2.2 U1.4 | length 1362.9
  Top Layer w6: J2.2 522.68,1337.32 560,1300 728.27,1300 U1.4 730.04,1299.41 779.41,1299.41 v4(780,1300) ; J1.6 v4(1710,1280)
  Bottom Layer w6: v4(780,1300) 820,1340 1555.36,1340 1605.36,1290 1695.23,1290 1705.23,1280 v4(1710,1280)
RS485SELECT: U1.20 U6.2 U6.3 | length 641.2
  Top Layer w6: U6.3 U6.2 427.5,768.8 427.5,817.5 v2(430,820) ; v2(900,830) 902.32,832.32 902.32,887.05 U1.20
  Bottom Layer w6: v2(430,820) 887.67,820 897.67,830 v2(900,830)
SCL0: R2.1 U1.10 U5.4 | length 679.4
  Top Layer w6: U5.4 140,976.73 140,996.49 143.51,1000 260,1000 360,1100 530,1100 559.81,1129.81 621.84,1129.81 639.68,1111.97 R2.1 660,1110 671.97,1098.03 U1.10
SCL1: R5.1 U1.13 U4.23 | length 231.9
  Top Layer w6: U4.23 531.57,995.64 543.69,995.64 550.91,988.42 550.91,979.09 559.81,970.19 621.84,970.19 639.68,988.03 R5.1 660,990 667.64,997.64 U1.13
SDA0\: R3.1 U1.11 U5.1 | length 590.8
  Top Layer w6: U5.1 199.53,982.17 201.45,984.09 265.52,984.09 369.75,1088.31 623.34,1088.31 639.68,1071.97 R3.1 660,1070 665.43,1064.57 U1.11
SDA1: R4.1 U1.12 U4.24 | length 214.1
  Top Layer w6: U4.24 578.46,1019.21 585.98,1011.69 623.03,1011.69 639.37,1028.03 R4.1 640.47,1031.1 U1.12
SDCLK: R31.2 U1.35 | length 115.7
  Top Layer w6: U1.35 1315.43,1064.57 1330,1050 R31.2
SDCMD: R30.2 U1.36 | length 113.7
  Top Layer w6: U1.36 1383.47,1098.03 1390.31,1091.19 R30.2
SDDAT0: R32.2 U1.34 | length 118.4
  Top Layer w6: U1.34 1313.25,1031.1 1334.36,1010 R32.2
SDDAT1: R33.2 U1.33 | length 122.3
  Top Layer w6: U1.33 1312.36,997.64 1330,980 1379.96,980 1381.15,978.81 1383.47,978.81 1390.31,971.97 R33.2
SDDAT2: R28.2 U1.38 | length 111.8
  Top Layer w6: U1.38 1385.28,1164.96 R28.2
SDDAT3: R29.2 U1.37 | length 110.3
  Top Layer w6: U1.37 1388.82,1131.5 R29.2
SDDET: D6.3 J5.Cd R27.1 U1.32 | length 1042.6
  Top Layer w6: U1.32 1315.83,964.17 1350,930 1720,930 1790.47,859.53 1900,859.53 ; D6.3 1900,938.19 1900,859.53 ; R27.1 2009.69,859.84 2010,859.53 ; J5.Cd 2010,859.53 ; 1900,859.53 2010,859.53
U1RXD: U1.22 U6.1 | length 595.2
  Top Layer w6: U6.1 475,771.19 483.81,780 v2(520,780) ; U1.22 971.57,863.19 980,854.77 v2(980,850)
  Bottom Layer w6: v2(520,780) 524.77,780 536.55,768.22 898.22,768.22 v2(980,850)
U1TXD: U1.21 U6.4 | length 728
  Top Layer w6: U6.4 325,805 v2(340,820) ; U1.21 939.06,888.43 939.06,840.94 v2(940,840)
  Bottom Layer w6: v2(340,820) 381.58,820 401.39,839.81 464.41,839.81 466,838.22 558.22,838.22 570,850 908.02,850 918.02,840 v2(940,840)
USB_D_N: D4.1 J4.A7 J4.B7 U1.23 | length 940.4
  Top Layer w5.81: D4.1 979.69,596.31 1013.72,596.31 1017.12,599.71 ; U1.23 1005.04,881.5 1010.01,876.53 1013.72,876.53 1017.12,873.12 1017.12,599.71 ; v3(1010,270) 1010.87,270.87 1010.87,293.78 J4.B7 ; J4.B7@1013.16,298.74 1013.16,303.95 1017.12,307.91 1017.12,313.93 ; 1017.12,313.93 1017.12,599.71 ; J4.A7@1039.68,345.83 1041.44,347.58 1041.44,378.25 v3(1043.19,380)
  Bottom Layer w5.81: v3(1010,270) 1010,267.35 1016.7,260.64 1016.7,248.58 1025.56,239.72 1040.45,239.72 1059.59,258.87 1059.59,303.89 1026.25,337.24 1026.25,376.6 1029.65,380 v3(1043.19,380)
USB_D_P: D4.6 J4.A6 J4.B6 U1.24 | length 909.1
  Top Layer w5.81: v3(1000,380) 1000.16,379.84 1000.16,345.98 J4.A6@1000.31,345.83 ; v3(1032.72,270) 1032.07,270.65 1032.07,294 J4.B6 1031.42,302.52 1026.43,307.51 1026.43,599.71 ; U1.24 1038.5,881.5 1033.53,876.53 1029.83,876.53 1026.43,873.12 1026.43,599.71 ; D4.6 1060.31,596.31 1029.84,596.31 1026.43,599.71
  Bottom Layer w5.81: v3(1000,380) 1013.54,380 1016.94,376.6 1016.94,333.38 1050.29,300.04 1050.29,262.72 1036.59,249.03 1029.41,249.03 1026.01,252.43 1026.01,260.64 1032.72,267.35 v3(1032.72,270)
VBUS: C5.2 C19.1 D3.2 J4.A4 J4.A9 J4.B4 J4.B9 R11.2 R15.2 U2.1 U2.3 U6.8 | length 933.4
  Top Layer w3.5: R11.2 81.97,1219.69 102.28,1240 190,1240 207.4,1222.6 D3.2
  Top Layer w11: U2.1 760.16,467.87 760.16,410.16 C5.2 779.32,391 821,391 834.8,404.8 U2.3 836.77,470 v1(880,470) 910,440 910,410 v1(940,380) 941.07,380 962.11,358.96 962.11,346.23 J4.A4 962.93,345.42 962.93,327.07 972.36,317.64 J4.B9 ; J4.B4 1071.19,295.05 1071.19,311.19 1080.22,320.22 1080.22,345.42 J4.A9 1081.04,346.23 1081.04,367.83 1088.72,375.52 v1(1088.72,380) ; v1(1140,480) 1140.16,480.16 1140.16,509.84 R15.2
  Top Layer w20: D3.2 211.18,1194.88 211.18,1168.82 220,1160 v1(220,1140) ; U6.8 475,535 476.81,533.19 492.33,533.19 504.07,521.45 508.55,521.45 v1(510,520) C19.1
pads on no net: D4.3 D4.4 D5.3 D7.3 D7.4 J4.99 J4.A2 J4.A3 J4.A8 J4.A10 J4.A11 J4.B2 J4.B3 J4.B8 J4.B10 J4.B11 U1.7 U1.14 U1.15 U1.41 U1.44 U1.61 U3.A1 U3.A2 U3.A7 U3.A8 U3.A9 U3.A10 U3.A11 U3.A12 U3.A13 U3.A14 U3.B1 U3.B3 U3.B4 U3.B5 U3.B6 U3.B7 U3.B8 U3.B9 U3.B10 U3.B11 U3.B12 U3.B13 U3.B14 U3.C1 U3.C3 U3.C5 U3.C7 U3.C8 U3.C9 U3.C10 U3.C11 U3.C12 U3.C13 U3.C14 U3.D1 U3.D2 U3.D3 U3.D4 U3.D12 U3.D13 U3.D14 U3.E1 U3.E2 U3.E3 U3.E5 U3.E8 U3.E9 U3.E10 U3.E12 U3.E13 U3.E14 U3.F1 U3.F2 U3.F3 U3.F10 U3.F12 U3.F13 U3.F14 U3.G1 U3.G2 U3.G3 U3.G10 U3.G12 U3.G13 U3.G14 U3.H1 U3.H2 U3.H3 U3.H5 U3.H12 U3.H13 U3.H14 U3.J1 U3.J2 U3.J3 U3.J12 U3.J13 U3.J14 U3.K1 U3.K2 U3.K3 U3.K6 U3.K7 U3.K10 U3.K12 U3.K13 U3.K14 U3.L1 U3.L2 U3.L3 U3.L12 U3.L13 U3.L14 U3.M1 U3.M2 U3.M3 U3.M7 U3.M8 U3.M9 U3.M10 U3.M11 U3.M12 U3.M13 U3.M14 U3.N1 U3.N3 U3.N6 U3.N7 U3.N8 U3.N9 U3.N10 U3.N11 U3.N12 U3.N13 U3.N14 U3.P1 U3.P2 U3.P7 U3.P8 U3.P9 U3.P10 U3.P11 U3.P12 U3.P13 U3.P14 U4.2 U4.3 U4.4 U4.5 U4.6 U4.7 U4.12 U4.14 U4.15 U4.16 U4.17 U4.19 U4.21 U4.22 U5.3 U5.6

## Polygon pours and split planes (outlines as drawn)
GND on Top Layer "NONET_L-01_P-001" (solid, pour order 1): 1350,1410 1350,1460 590,1460 590,1380 690,1380 710,1360 750,1360 750,1400 760,1410 1250,1410
VBUS on Top Layer "NONET_L-01_P-001" (solid, pour order 0): 750,480 750,380 850,380 870,400 910,400 920,390 920,370 951.07,370 950,371.07 950,390 940,390 930,400 930,480 820,480 820,390 780,390 780,440 770,450 770,480
VBUS on Mid Layer 3 (split plane): 2759.9,20.1 20.1,20.1 20.1,1479.9 2759.9,1479.9
GND on Mid Layer 1 (split plane): 2759.9,20.1 20.1,20.1 20.1,1479.9 2759.9,1479.9
+3.3 on Mid Layer 2 (split plane): 2759.9,20.1 20.1,20.1 20.1,1479.9 2759.9,1479.9
GND on Mid Layer 4 (split plane): 2759.9,20.1 20.1,20.1 20.1,1479.9 2759.9,1479.9

## Text inside footprints (layer, text, board x,y; h text height)
C6: Top Overlay "A" at 724,614.08 h19.68
U1: Top Assembly "Antenna" at 1273.25,1654.96 h39.37 r270